# EAGLE board schema (EAGLE 6.5.0)
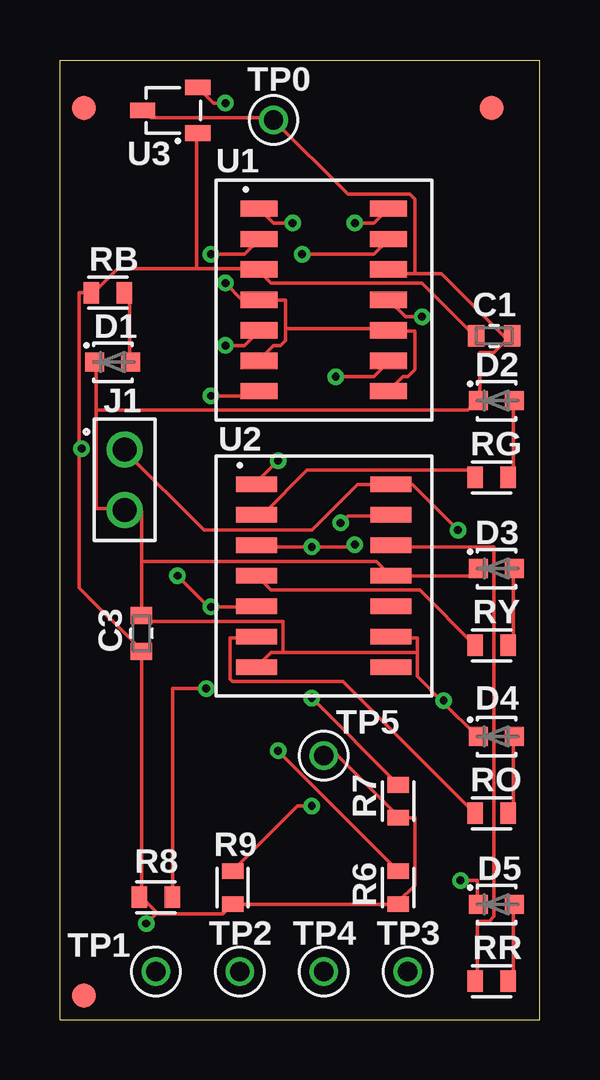
[diagram p0: board, top side]
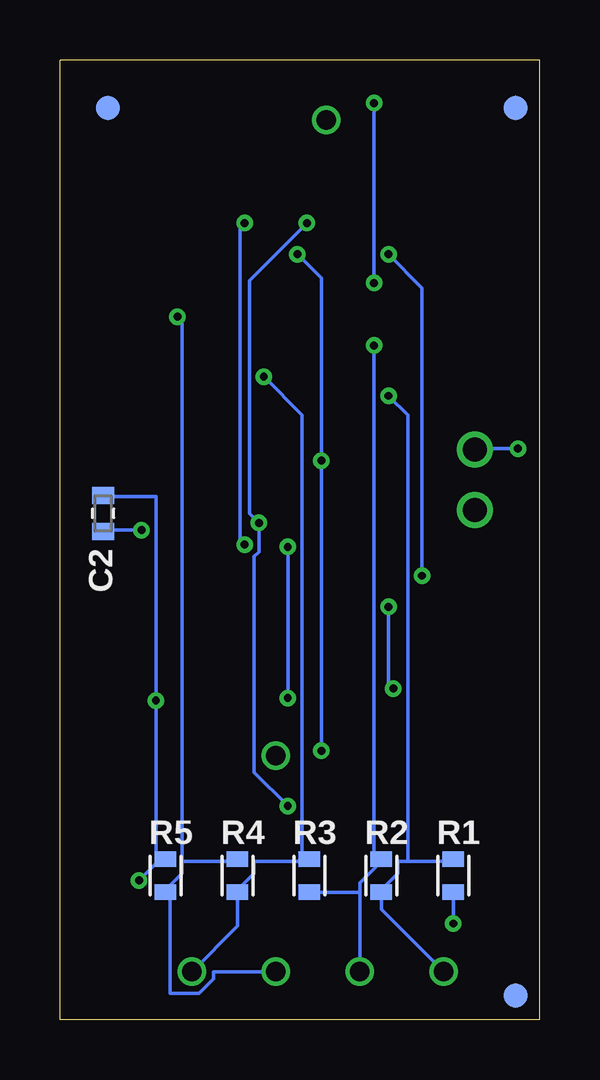
[diagram p1: board, bottom side, seen from below]

Size 20 x 40 mm. Coordinates in mm from the lower left corner, seen from the top.
Outline: 0,0 20,0 20,40 0,40 0,0
Copper layers (1*16): Top 0.0356mm / dielectric 1.5011mm / Bottom 0.0356mm
Design rules "OSHPark2Layer": minimum track width 6mil, minimum drill 13mil, track to track 6mil, track to pad 6mil, pad to pad 12mil, via to via 12mil, smd to smd 6mil, copper to edge 0mil, drill to drill 6mil, minimum pad ring 7mil, minimum via ring 7mil, stop-mask expansion 3mil, vias tented up to drill 0mil, thermal gap 10mil
tRestrict: 4 lines
bRestrict: 4 lines

## Footprints (pad centres in the part's own frame; a part is rotated, then mirrored left to right if it is on the bottom)
C0603 = smd 0.7 x 0.9: 1 -0.75,0; 2 0.75,0
LED = smd 0.8 x 0.8: ANODE 0.75,0; CATHODE -0.75,0
FIDUCIAL_1MM = smd 1 x 1: 1 0,0
1X2-HEADER = drill 1: 1 0,1.27; 2 0,-1.27
R_0603 = smd 0.65 x 0.9: P$1 -0.68,0; P$2 0.68,0
TEST_POINT = drill 0.8: 1 0,0
14-SOIC = smd 1.55 x 0.67: 1 -2.7,3.81; 2 -2.7,2.54; 3 -2.7,1.27; 4 -2.7,0; 5 -2.7,-1.27; 6 -2.7,-2.54; 7 -2.7,-3.81; 8 2.7,-3.81; 9 2.7,-2.54; 10 2.7,-1.27; 11 2.7,0; 12 2.7,1.27; 13 2.7,2.54; 14 2.7,3.81
14-TSSOP = smd 1.7 x 0.65: 1 -2.8,3.81; 2 -2.8,2.54; 3 -2.8,1.27; 4 -2.8,0; 5 -2.8,-1.27; 6 -2.8,-2.54; 7 -2.8,-3.81; 8 2.8,-3.81; 9 2.8,-2.54; 10 2.8,-1.27; 11 2.8,0; 12 2.8,1.27; 13 2.8,2.54; 14 2.8,3.81
3-PIN_SOT_23 = smd 1.049 x 0.65: GND -1.151,0; VDD 1.151,-0.95; VOUT 1.151,0.95

## Placement (x,y rotation side)
C1  C0603  [C0603]  18.1,28.5 0 top
C2  C0603  [C0603]  18.2,21.1 90 bottom
C3  C0603  [C0603]  3.4,16.1 90 top
D1  LED  [LED]  2.2,27.4 0 top
D2  LED  [LED]  18.2,25.8 0 top
D3  LED  [LED]  18.2,18.8 0 top
D4  LED  [LED]  18.2,11.8 0 top
D5  LED  [LED]  18.2,4.8 0 top
FD1  FIDUCIAL1MM  [FIDUCIAL_1MM]  1,1 0 top
FD2  FIDUCIAL1MM  [FIDUCIAL_1MM]  1,38 0 top
FD3  FIDUCIAL1MM  [FIDUCIAL_1MM]  18,38 0 bottom
FD4  FIDUCIAL1MM  [FIDUCIAL_1MM]  1,1 0 bottom
FD5  FIDUCIAL1MM  [FIDUCIAL_1MM]  1,38 0 bottom
FD6  FIDUCIAL1MM  [FIDUCIAL_1MM]  18,38 0 top
J1  [1X2-HEADER]  2.7,22.5 0 top
R1  RESISTOR_0603  [R_0603]  3.6,6 90 bottom
R2  RESISTOR_0603  [R_0603]  6.6,6 90 bottom
R3  RESISTOR_0603  [R_0603]  9.6,6 90 bottom
R4  RESISTOR_0603  [R_0603]  12.6,6 90 bottom
R5  RESISTOR_0603  [R_0603]  15.6,6 90 bottom
R6  RESISTOR_0603  [R_0603]  14.1,5.5 90 top
R7  RESISTOR_0603  [R_0603]  14.1,9.1 90 top
R8  RESISTOR_0603  [R_0603]  4,5.1 0 top
R9  RESISTOR_0603  [R_0603]  7.2,5.5 90 top
RB  RESISTOR_0603  [R_0603]  2,30.3 0 top
RG  RESISTOR_0603  [R_0603]  18,22.6 0 top
RO  RESISTOR_0603  [R_0603]  18,8.6 0 top
RR  RESISTOR_0603  [R_0603]  18,1.6 0 top
RY  RESISTOR_0603  [R_0603]  18,15.6 0 top
TP0  TEST_POINT_VIA  [TEST_POINT]  8.9,37.5 0 top
TP1  TEST_POINT_VIA  [TEST_POINT]  4,2 0 top
TP2  TEST_POINT_VIA  [TEST_POINT]  7.5,2 0 top
TP3  TEST_POINT_VIA  [TEST_POINT]  14.5,2 0 top
TP4  TEST_POINT_VIA  [TEST_POINT]  11,2 0 top
TP5  TEST_POINT_VIA  [TEST_POINT]  11,11 0 top
U1  LM139_COMPARATOR  [14-SOIC]  11,30 0 top
U2  74VH14_INVERTER  [14-TSSOP]  11,18.5 0 top
U3  MCP9700  [3-PIN_SOT_23]  4.6,37.9 0 top

## Library data of the parts
C1-C3 = chipCapacitors
D1-D5 J1 U1-U3 = Andres_Project
FD1-FD6 = adafruit
R1-R9 RB RG RO RR RY = chipResistors
TP0 TP1-TP5 = newtempSensor

## Nets
N$0: R6.P$2 U1.13 U2.1
N$1: C1.1 C2.1 C3.1 J1.1 R1.P$1 R6.P$1 R7.P$1 R8.P$1 R9.P$1 RB.P$1 TP5.1 U1.3 U2.14 U3.VDD
N$2: R7.P$2 U1.14 U2.3
N$3: R8.P$2 U1.2 U2.5
N$4: R9.P$2 U1.1 U2.13
N$5: R1.P$2 R2.P$1 TP1.1 U1.7
N$6: R3.P$2 R4.P$1 TP3.1 U1.9
N$7: R4.P$2 R5.P$1 TP4.1 U1.11
N$8: R2.P$2 R3.P$1 TP2.1 U1.5
N$9: U1.4 U1.6 U1.8 U1.10 U3.VOUT
N$10: C1.2 C2.2 C3.2 D1.CATHODE D2.CATHODE D3.CATHODE D4.CATHODE D5.CATHODE J1.2 R5.P$2 TP0.1 U1.12 U2.7 U2.9 U2.11 U3.GND
N$11: RR.P$1 U2.12
N$12: RY.P$1 U2.4
N$13: RO.P$1 U2.6
N$14: RG.P$1 U2.2
N$15: D2.ANODE RG.P$2
N$16: D3.ANODE RY.P$2
N$17: D4.ANODE RO.P$2
N$18: D5.ANODE RR.P$2
N$19: D1.ANODE RB.P$2

## Tracks (layer width: path | path; a pad name or v marks a point on that pad's centre or on a via)
N$0  (via drill 0.33)
  Top 0.152: v9.1,11.2 14.1,6.2 R6.P$2 | v9.1,23.3 8.2,22.4 U2.1 | v10.1,31.9 13.1,31.9 13.7,32.5 U1.13
  Bottom 0.152: v9.1,11.2 v9.1,23.3 9.1,30.9 v10.1,31.9
N$1  (via drill 0.33)
  Top 0.152: v16.6,20.4 14.7,22.3 U2.14 | U2.14 12.4,22.3 10.5,20.4 6,20.4 2.7,23.7 J1.1 | U2.14 | TP5.1 11.6,11 14.1,8.5 R7.P$1 14.1,8.4 14.8,8.4 14.8,5.6 14.1,4.9 R6.P$1 14.1,4.8 7.2,4.8 | 4.05,4.45 4.1,4.4 6.8,4.4 7.2,4.8 | 4.05,4.45 3.4,5.1 | 3.4,5.1 C3.1 3.4,15.4 0.8,18 0.8,23.8 | 3.4,5.1 R8.P$1 | 4.05,4.45 v3.6,4 | 7.2,4.8 R9.P$1 | C1.1 17.3,28.5 15.1,30.7 8.8,30.7 8.3,31.2 U1.3 8.3,31.3 5.7,31.3 | 5.7,31.3 2.4,31.3 1.4,30.3 RB.P$1 0.8,30.3 0.8,23.8 | 5.7,31.3 5.7,36.9 U3.VDD | 0.8,23.8 v0.9,23.8
  Bottom 0.152: v16.6,20.4 18.2,20.4 C2.1 | v3.6,4 R1.P$1 | v0.9,23.8 2.7,23.8 J1.1
N$2  (via drill 0.33)
  Top 0.152: v10.5,13.4 14.1,9.8 R7.P$2 | U2.3 8.2,19.7 v10.5,19.7 12.2,19.7 v12.3,19.8 | v12.3,33.2 13.1,33.2 U1.14
  Bottom 0.152: v10.5,19.7 v10.5,13.4 | v12.3,33.2 12.5,33 12.5,20 v12.3,19.8
N$3  (via drill 0.33)
  Top 0.152: v6.1,13.8 4.7,13.8 4.7,5.1 R8.P$2 | U2.5 8.2,17.2 v6.3,17.2 6.2,17.2 v4.9,18.5 | v6.3,31.9 7.7,31.9 8.3,32.5 U1.2
  Bottom 0.152: v6.1,13.8 6.3,14 v6.3,17.2 | v6.3,31.9 4.9,30.5 v4.9,18.5
N$4  (via drill 0.33)
  Top 0.152: v10.5,8.9 9.9,8.9 7.2,6.2 R9.P$2 | v11.7,20.7 12,21 13.8,21 U2.13 | v9.7,33.2 8.9,33.2 U1.1
  Bottom 0.152: v10.5,8.9 11.9,10.3 11.9,19.3 11.7,19.5 v11.7,20.7 12.1,21.1 12.1,30.8 v9.7,33.2
N$5  (via drill 0.33)
  Top 0.152: v6.3,26 8.2,26 8.3,26.1 U1.7
  Bottom 0.152: 5.5,6.6 5.9,6.6 5.9,6.1 6.6,5.4 R2.P$1 6.6,4.6 TP1.1 | 5.5,6.6 3.6,6.6 R1.P$2 | v6.3,26 5.5,25.2 5.5,6.6
N$6  (via drill 0.33)
  Top 0.152: v11.5,26.8 13.1,26.8 13.7,27.4 U1.9
  Bottom 0.152: 9.9,6.6 11.9,6.6 11.9,6.1 12.6,5.4 R4.P$1 12.6,3.9 TP3.1 | 9.9,6.6 9.6,6.6 R3.P$2 9.9,6.6 | v11.5,26.8 9.9,25.2 9.9,6.6
N$7  (via drill 0.33)
  Top 0.152: U1.11 14.4,29.3 v15.1,29.3
  Bottom 0.152: 14.9,6.6 12.6,6.6 R4.P$2 | 14.9,6.6 14.9,6.1 15.6,5.4 R5.P$1 15.4,5.5 15.4,1.1 14.2,1.1 13.6,1.7 13.6,2 TP4.1 | v15.1,29.3 14.9,29.1 14.9,6.6
N$8  (via drill 0.33)
  Top 0.152: v6.9,28.1 7.7,28.1 8.3,28.7 U1.5
  Bottom 0.152: TP2.1 7.5,5.3 | 7.5,5.3 7.5,5.7 6.6,6.6 R2.P$2 6.9,6.4 v6.9,28.1 | 7.5,5.3 9.6,5.3 R3.P$1
N$9  (via drill 0.33)
  Top 0.152: U1.8 14.3,26.8 14.5,26.8 14.8,27.1 14.8,28.7 13.7,28.7 U1.10 13.7,28.8 9.4,28.8 | v6.9,38.2 6.4,38.2 5.8,38.8 U3.VOUT | v6.9,30.7 7.6,30 U1.4 9.4,30 9.4,28.8 | 9.4,28.8 9.4,28.3 9.2,28.1 8.9,28.1 8.3,27.5 U1.6
  Bottom 0.152: v6.9,30.7 v6.9,38.2
N$10  (via drill 0.33)
  Top 0.152: U3.GND 3.5,37.9 3.8,37.6 8.8,37.6 TP0.1 12,34.4 14.6,34.4 14.8,34.2 14.8,31.1 | 14.8,31.1 15.9,31.1 18.6,28.4 C1.2 18.8,28.5 18.1,27.8 17.5,27.8 17.5,25.8 D2.CATHODE 17.4,25.8 17,25.4 1.5,25.4 | 14.8,31.1 13.8,31.1 13.7,31.2 U1.12 | v16.7,5.8 17.4,5.8 17.4,4.8 D5.CATHODE | 15.95,13.25 14.9,14.3 14.9,15.3 | 15.95,13.25 17.4,11.8 D4.CATHODE | 14.9,15.3 14.9,15.9 13.8,15.9 U2.9 | 14.9,15.3 9.3,15.3 | 9.3,15.3 8.8,15.3 U2.7 | D3.CATHODE 17.4,18.8 17.1,18.5 U2.11 13.2,19.1 3.4,19.1 | 1.5,25.4 1.5,21.3 2.7,21.3 J1.2 2.7,21.2 3.4,21.2 3.4,19.1 | 1.5,25.4 1.5,27.4 D1.CATHODE | 3.4,19.1 C3.2 3.4,16.8 3.6,16.6 9.3,16.6 9.3,15.3 | v16,13.3 15.95,13.25
  Bottom 0.152: v16.7,5.8 15.9,6.6 15.6,6.6 R5.P$2 16,6.6 v16,13.3 16,21.8 18.2,21.8 C2.2
N$11
  Top 0.152: RR.P$1 17.4,1.6 17.4,4.1 17.9,4.1 18.1,4.3 18.1,19.7 13.8,19.7 U2.12
N$12
  Top 0.152: U2.4 8.8,17.9 15,17.9 17.3,15.6 RY.P$1
N$13
  Top 0.152: RO.P$1 17.3,8.6 11.8,14.1 7.2,14.1 7.1,14.2 7.1,15.9 8.2,15.9 U2.6
N$14
  Top 0.152: RG.P$1 17.3,22.6 17,22.9 10.3,22.9 8.5,21.1 8.2,21.1 U2.2
N$15
  Top 0.152: RG.P$2 18.9,22.6 18.9,25.8 D2.ANODE
N$16
  Top 0.152: RY.P$2 18.9,15.6 18.9,18.8 D3.ANODE
N$17
  Top 0.152: RO.P$2 18.9,8.6 18.9,11.8 D4.ANODE
N$18
  Top 0.152: RR.P$2 18.9,1.6 18.9,4.8 D5.ANODE
N$19
  Top 0.152: RB.P$2 2.9,30.3 2.9,27.4 D1.ANODE